# Altium PCB PCB1.PcbDoc
Units mil, origin at the board's own origin, x right, y up, seen from the top; angles counter-clockwise.
Board outline 3900 x 3900 mil, 2 copper layers (Top Layer, Bottom Layer), stack 61.756 mil thick; 48 components, 31 nets, 155 pads, 18 vias.
Unrouted connection lines stored in the file: 4.
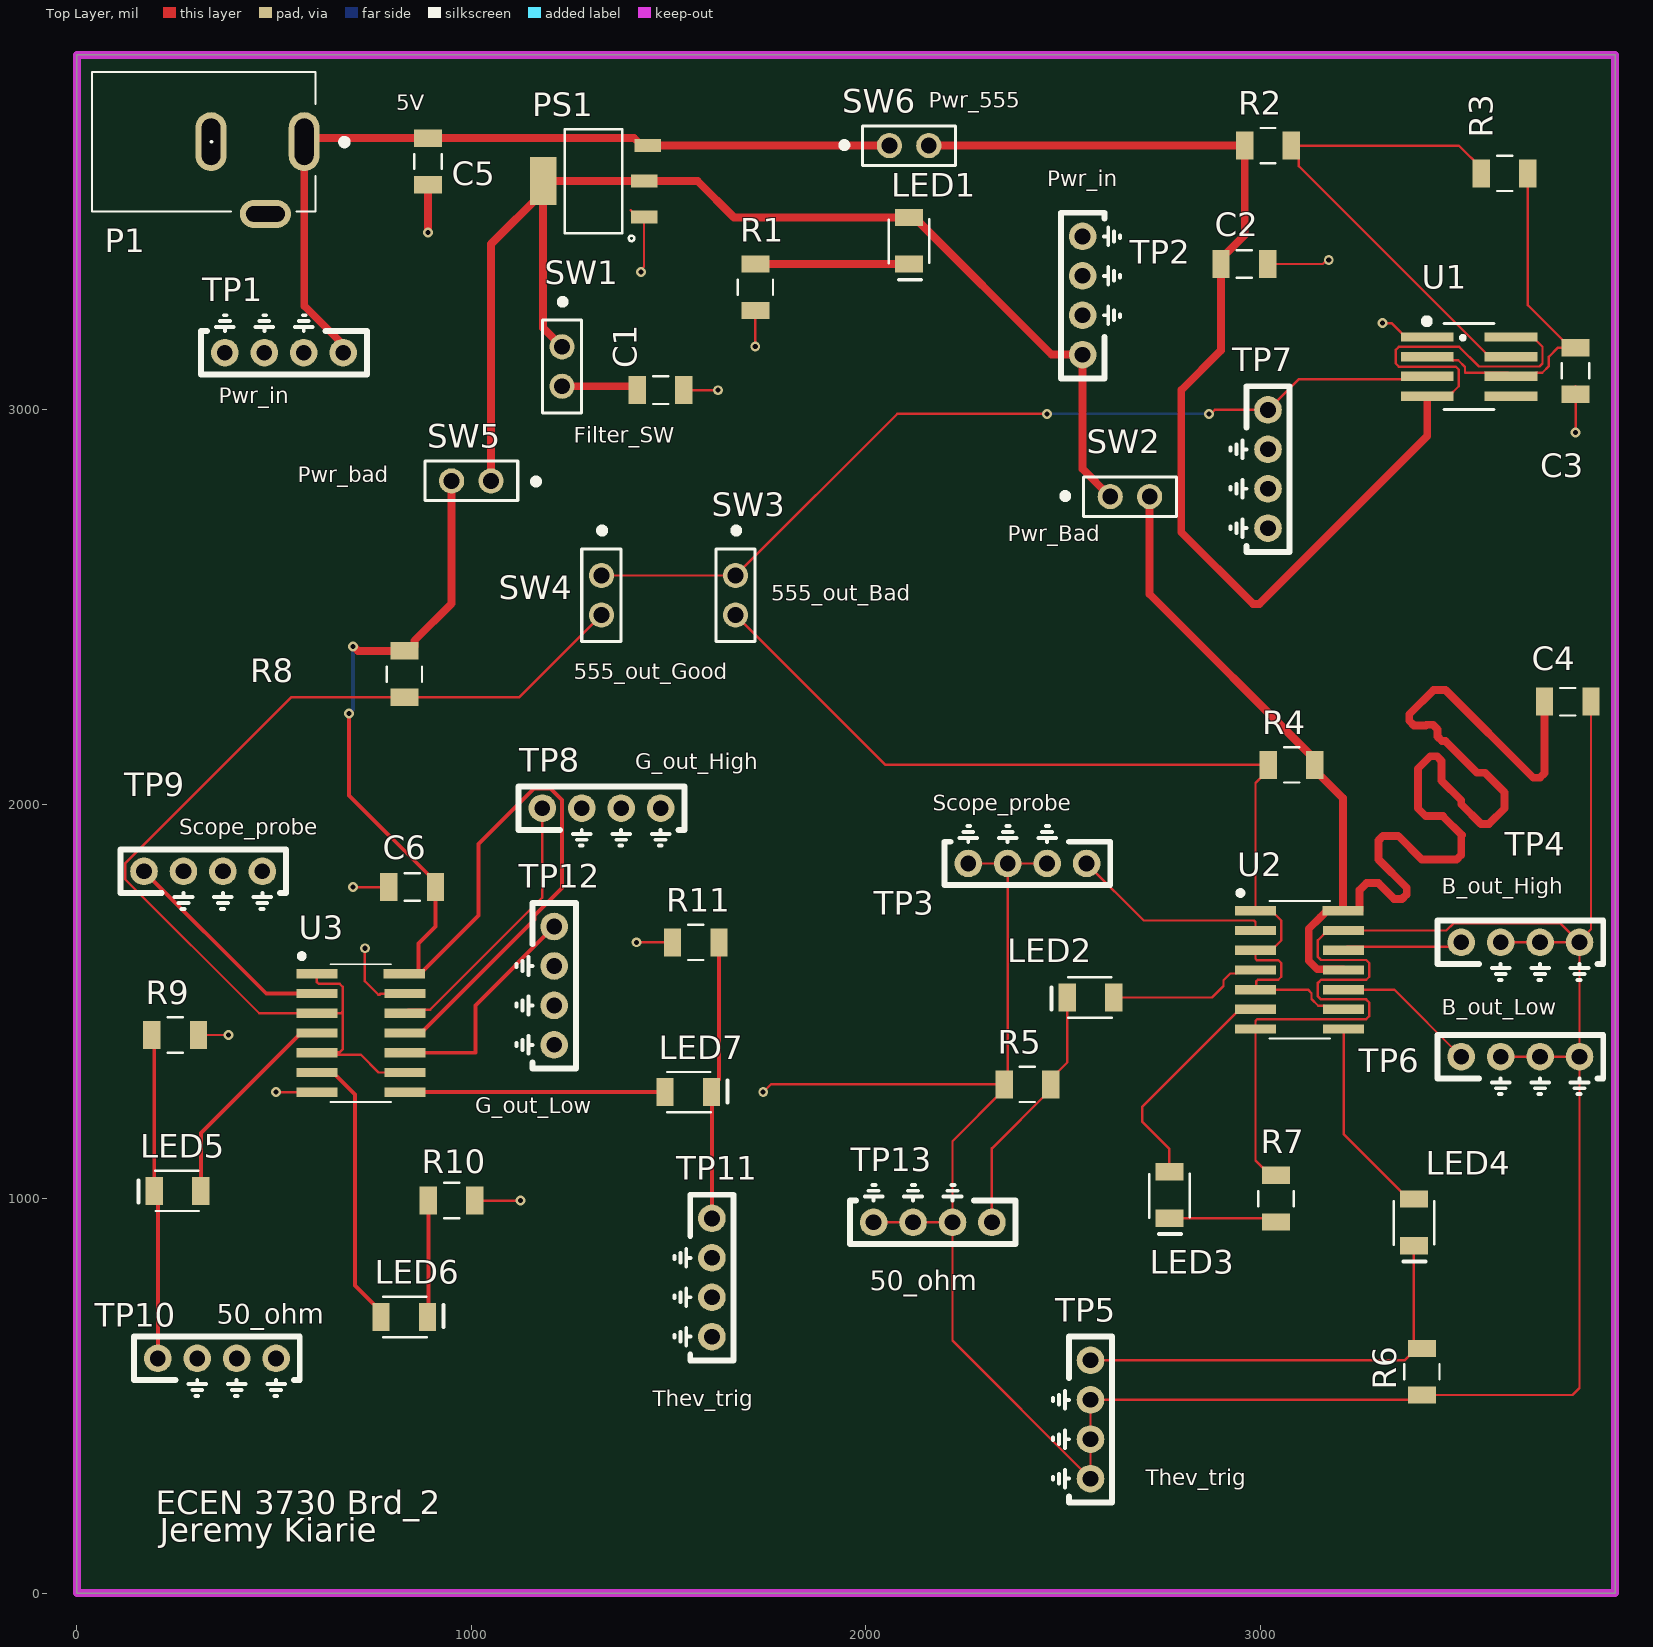
[diagram p0: Top Layer view]
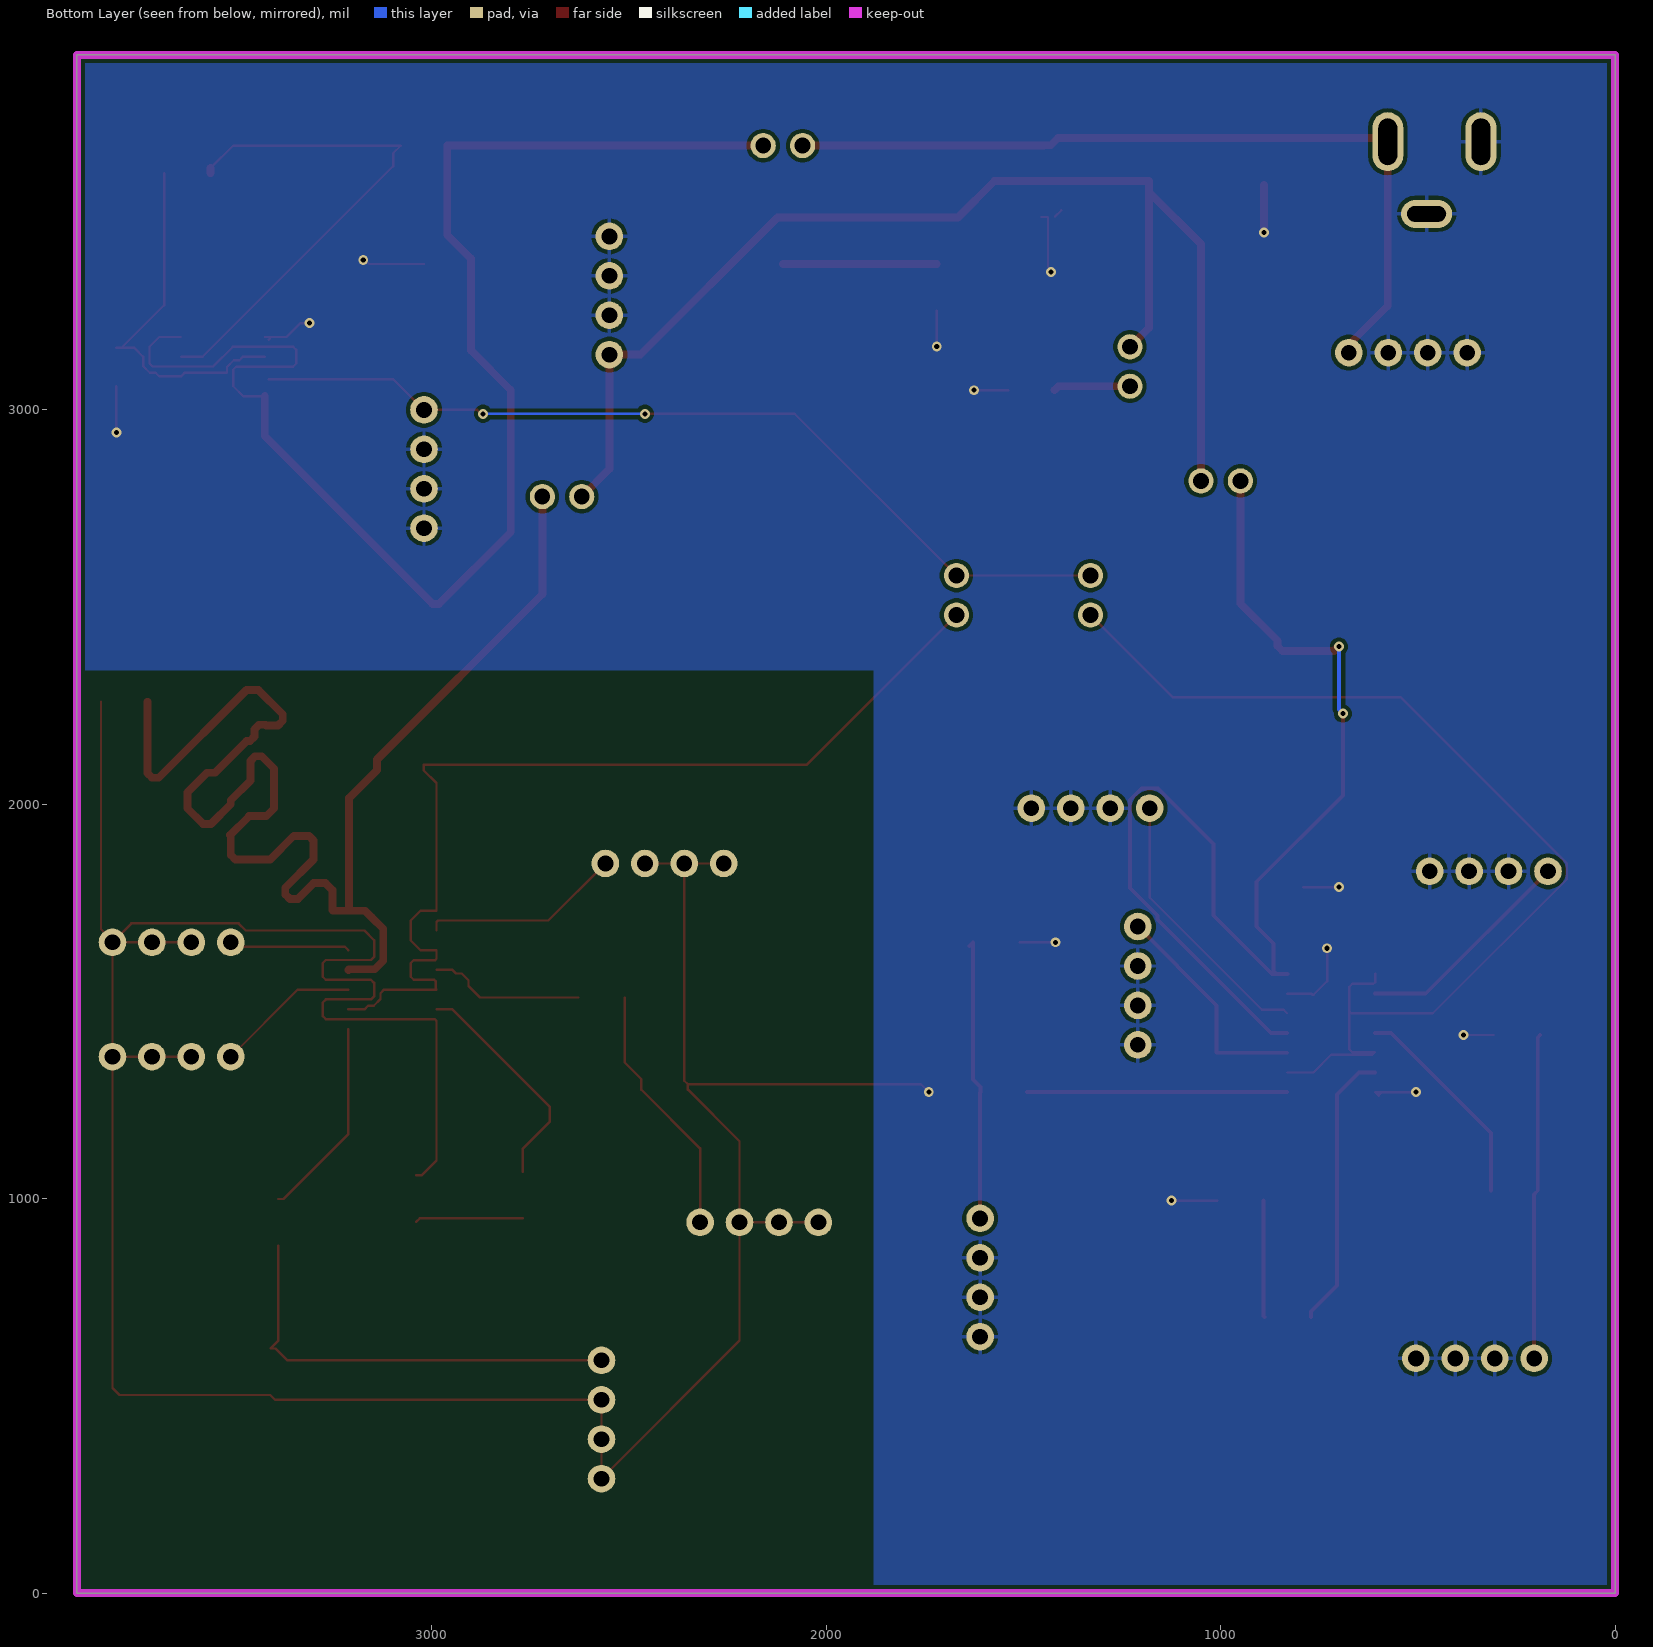
[diagram p1: Bottom Layer view, seen from below]
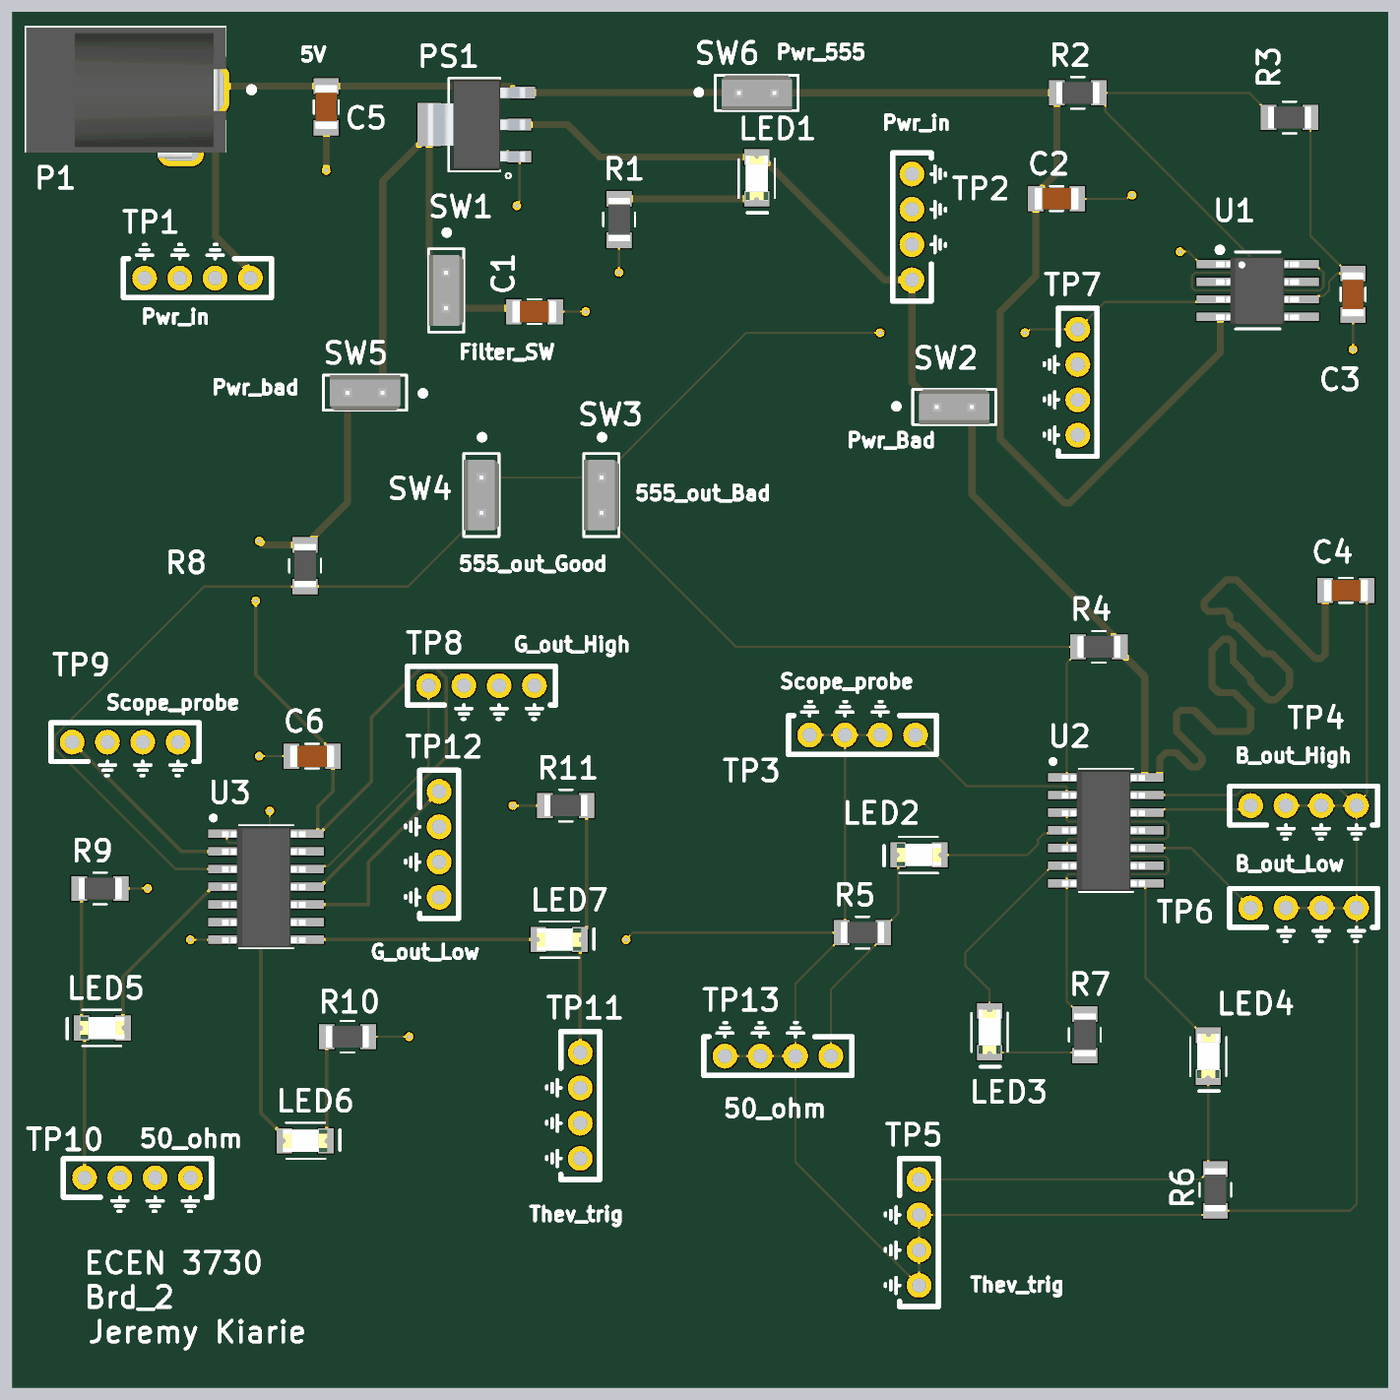
[diagram p2: 3D render of the assembled board from above, using the file's embedded part models]

## Layer stack, top to bottom
Top Solder: solder mask 1, SM-001, Dk 4
Top Layer: signal copper 1.378
Dielectric 1: core 59, Core-043, Dk 4.3
Bottom Layer: signal copper 1.378
Bottom Solder: solder mask 1, SM-001, Dk 4

## Board outline
0,0 3900,0 3900,3900 0,3900

## Design rules (kind name [scope] priority, off if disabled: settings)
BoardOutlineClearance [All] p1: gap=10 ignorepadtopadclearanceinfootprint=FALSE except(0: Arc-SplitContinuation Track-SplitContinuation SMDPad-SplitContinuation THPad-SplitContinuation Via-SplitContinuation Fill-SplitContinuation Poly-SplitContinuation Region-SplitContinuation Text-SplitContinuation)
Clearance [All] p1: gap=10 ignorepadtopadclearanceinfootprint=FALSE
PlaneClearance [All] p1: clearance=10
PlaneConnect [All] p1: planeconnectstyle=Direct reliefexpansion=20 reliefentries=4 reliefconductorwidth=10 reliefairgap=10
PolygonConnect [All] p1: thpad.connectstyle=Relief thpad.reliefconductorwidth=10 thpad.reliefentries=4 thpad.polygonreliefangle="90 Angle" thpad.airgapwidth=10 smdpad.connectstyle=Direct smdpad.reliefconductorwidth=10 smdpad.reliefentries=4 smdpad.polygonreliefangle="90 Angle" smdpad.airgapwidth=10 via.connectstyle=Direct via.reliefconductorwidth=10 via.reliefentries=4 via.polygonreliefangle="90 Angle" via.airgapwidth=10
RoutingVias [All] p1: holewidth=13 width=25 viastyle="Through Hole" minholewidth=13 minwidth=25 maxholewidth=60 maxwidth=80
SolderMaskExpansion [All] p1: expansion=4 istentingtop=FALSE
SupplyNets "Schematic Supply Nets_3" [InNet('+3.3')] p1: voltage=0.000
SupplyNets "Schematic Supply Nets_2" [InNet('GND')] p2: voltage=0.000
SupplyNets "Schematic Supply Nets_1" [InNet('+5')] p3: voltage=0.000
UnRoutedNet [All] p1: checkbadconnections=TRUE
Width "Schematic Width Constraint_4" [InNet('NetC4_2')] p1: maxlimit=100 minlimit=10 preferedwidth=20 minimp=50.000000 maximp=50.000000 favimp=50.000000
Width "Schematic Width Constraint_2" [InNet('+3.3')] p2: maxlimit=100 minlimit=10 preferedwidth=20 minimp=50.000000 maximp=50.000000 favimp=50.000000
Width "Schematic Width Constraint" [InNet('NetC6_2')] p3: maxlimit=100 minlimit=10 preferedwidth=20 minimp=50.000000 maximp=50.000000 favimp=50.000000
Width "Schematic Width Constraint_1" [InNet('+5')] p4: maxlimit=100 minlimit=10 preferedwidth=20 minimp=50.000000 maximp=50.000000 favimp=50.000000
Width [All] p5: maxlimit=100 minlimit=6 preferedwidth=6 minimp=50.000000 maximp=50.000000 favimp=50.000000
27 further rules are at their usual default settings.

## Components (designator, comment, footprint, x,y, rotation, side; value= is the part's Value field where it differs from the comment)
C1 "22uF" 1206_Passive_Capacitor 1480,3050 r180 top
C2 "22uF" 1206_Passive_Capacitor 2960,3370 r180 top
C3 "1uF" 1206_Passive_Capacitor 3800,3099 r270 top
C4 "22uF" 1206_Passive_Capacitor 3780,2260 r180 top
C5 "22uF" 1206_Passive_Capacitor 890,3630 r90 top
C6 "22uF" 1206_Passive_Capacitor 850,1790 r0 top
LED1 "Green" LED_1206 2110,3429 r270 top
LED2 "Red" LED_1206 2570,1510 r180 top
LED3 "Red" LED_1206 2770,1009 r270 top
LED4 "Red" LED_1206 3390,940 r270 top
LED5 "Red" LED_1206 255,1020 r180 top
LED6 "Red" LED_1206 830,700 r0 top
LED7 "Red" LED_1206 1550,1270 r0 top
P1 "Power Jack" Power_Jack 576.22,3680 r180 top value="CONN PWR JACK 2X5.5MM SOLDER"
PS1 "AMS1117-3.3" LDO 1310,3580 r90 top value="IC REG LINEAR 3.3V 800MA SOT223"
R1 "1k" 1206_Passive_Resitor 1720,3311 r90 top value="1K Ohm"
R2 "1k" 1206_Passive_Resitor 3020,3670 r0 top value="1K Ohm"
R3 "1k" 1206_Passive_Resitor 3620,3600 r0 top value="1K Ohm"
R4 "10k" 1206_Passive_Resitor 3080,2100 r0 top value=10KOhm
R5 "47 Ohms" 1206_Passive_Resitor 2410,1290 r0 top value=47Ohm
R6 "47 Ohms" 1206_Passive_Resitor 3410,561 r90 top value=47Ohm
R7 "47 Ohms" 1206_Passive_Resitor 3040,1000 r270 top value=47Ohm
R8 "10k" 1206_Passive_Resitor 830,2330 r90 top value=10KOhm
R9 "47 Ohms" 1206_Passive_Resitor 249,1415 r180 top value=47Ohm
R10 "47 Ohms" 1206_Passive_Resitor 950,995 r180 top value=47Ohm
R11 "47 Ohms" 1206_Passive_Resitor 1569,1650 r0 top value=47Ohm
SW1 "SW_2Pin_100mil_Switch" 2Pin-Header-Conn 1230,3160 r270 top
SW2 "pwr_bad" 2Pin-Header-Conn 2620,2780 r0 top
SW3 "555_out_Bad" 2Pin-Header-Conn 1670,2580 r270 top
SW4 "555_out_Good" 2Pin-Header-Conn 1330,2580 r270 top
SW5 "pwr_good" 2Pin-Header-Conn 1050,2820 r180 top
SW6 "Pwr_555_SW" 2Pin-Header-Conn 2060,3670 r0 top
TP1 "Power_in_TP" TP10x_Probe 525,3145 r180 top
TP2 "Power_in_TP" TP10x_Probe 2550,3290 r90 top
TP3 "Scope_TP" TP10x_Probe 2410,1850 r180 top
TP4 "B_out_High" TP10x_Probe 3660,1650 r0 top
TP5 "trig_thev" TP10x_Probe 2570,440 r270 top
TP6 "B_out_Low" TP10x_Probe 3660,1360 r0 top
TP7 "555_out_TP" TP10x_Probe 3020,2850 r270 top
TP8 "G_out_High" TP10x_Probe 1330,1990 r0 top
TP9 "Scope_TP" TP10x_Probe 320,1830 r0 top
TP10 "B_50_TP" TP10x_Probe 355,595 r0 top
TP11 "trig_thev" TP10x_Probe 1610,800 r270 top
TP12 "G_out_Low" TP10x_Probe 1210,1540 r270 top
TP13 "G_50_TP" TP10x_Probe 2170,940 r180 top
U1 "555_Slow" TS555IDTTR 3530,3110 r0 top
U2 "SN74AHC14DR" HEX_74AC14 3100,1580 r0 top
U3 "SN74AHC14DR" HEX_74AC14 720,1420 r0 top

## Footprints (in the part's own frame and the unit in brackets; to place one, negate y for a bottom-side part, rotate by r counter-clockwise, add the part's x,y. Pads: shape width x height; smd on the part's side, far side on the other; paste and mask are expansions set on the pad)
2Pin-Header-Conn [mm]
  round 1.62 hole 1.02: 1(0,0) 2(2.54,0)
  silkscreen extent -3.03,-1.27 4.26,1.26, body extent -1.27,-1.27 3.81,1.27, height 8.13
1206_Passive_Capacitor [mil]
  rect 44x71 smd: 1(-59,0) 2(59,0)
  silkscreen extent -19,-35 19,35, body extent -63,-31 63,32, height 50
1206_Passive_Resitor [mil]
  rect 44x71 smd: 1(-59,0) 2(59,0)
  silkscreen extent -19,-45 19,45, body extent -61,-31 61,31, height 26
HEX_74AC14 [mm]
  rect 2.65x0.6 smd: 1(-2.836,3.81) 2(-2.836,2.54) 3(-2.836,1.27) 4(-2.836,0) 5(-2.836,-1.27) 6(-2.836,-2.54) 7(-2.836,-3.81) 8(2.836,-3.81) 9(2.836,-2.54) 10(2.836,-1.27) 11(2.836,0) 12(2.836,1.27) 13(2.836,2.54) 14(2.794,3.81)
  silkscreen extent -3.94,-4.43 1.95,5.08, body extent -3.18,-4.35 2.82,4.3, height 1.75
LDO [mm]
  rect 0.838x1.7 smd: 1(-2.311,-3.25) 2(0,-3.25) 3(2.311,-3.5)
  rect 3.099x1.7 smd: 4(0,3.25)
  silkscreen extent -3.86,-2.62 3.35,1.85, body extent -3.25,-3.65 3.25,3.35, height 1.85
LED_1206 [mil]
  rect 44x71 smd: 1(-59,0) 2(59,0)
  silkscreen extent -54,-51 99,51, body extent -63,-31 63,31, height 28
Power_Jack [mm]
  oval 2x3.8 hole 1.2 slot 3 at 90 deg: 1(0,0) 2(6,0)
  oval 3.3x1.8 hole 1 slot 2.5 at 0 deg: 3(2.5,4.65)
  silkscreen extent -2.79,-4.5 13.68,4.5, body extent -0.76,-4.45 13.64,4.95, height 11.49
TP10x_Probe [mil] "Small Probs footprint"
  round 70 hole 40: 1(-150,0) 2(-50,0) 2(50,0) 2(150,0)
  silkscreen extent -210,-95 210,55
TS555IDTTR [mm] "IC OSC Single Timer 2.7MHz 8SOIC"
  rect 3.4x0.6 smd: 1(-2.7,1.905) 2(-2.7,0.635) 3(-2.7,-0.635) 4(-2.7,-1.905) 5(2.7,-1.905) 6(2.7,-0.635) 7(2.7,0.635) 8(2.7,1.905)
  silkscreen extent -2.85,-2.77 1.6,3.05, body extent -3.03,-2.48 2.96,2.43, height 1.75

## Part data
C1 C2 C4 C5 C6: library part C_22uF_1206, "22uF ±10% 25V X5R 1206 Multilayer Ceramic Capacitors MLCC - SMD/SMT RoHS", LCSC Part#=C12891, MFR Part #=CL31A226KAHNNNE, Datasheet=https://datasheet.lcsc.com/lcsc/1811031514_Samsung-Electro-Mechanics-CL31A226KAHNNNE_C12891.pdf, Type=basic
C3: library part C_1uF_1206, "MULTILAYER CERAMIC CAPACITORS MLCC - SMD/SMT 1UF 50V 1206 ROHS", LCSC Part#=C1848, MFR Part #=CL31B105KBHNNNE, Digikey Link=https://www.digikey.com/product-detail/en/C1206C105M4RACTU/399-8150-1-ND/3471873/?itemSeq=304982366, Type=Basic
LED1: library part LED_GREEN_1206, "Green 513~528nm 1206 Light Emitting Diodes (LED) RoHS", LCSC Part#=C434439, MFR Part #=SZYY1206G, Datasheet=https://datasheet.lcsc.com/lcsc/2006301532_Yongyu-Photoelectric-SZYY1206G_C434439.pdf, Type=Extended
LED2 LED3 LED4 LED5 LED6 LED7: library part LED_RED_1206, "Red 621~631nm 1206 Light Emitting Diodes (LED) RoHS", LCSC Part#=C93133, MFR Part #=15-21/R6C-FQ1R1B/2T, Datasheet=https://datasheet.lcsc.com/szlcsc/1811151241_Everlight-Elec-15-21-R6C-FQ1R1B-2T_C93133.pdf, Type=Extended
P1: library part "P_Power Jack", "Power Barrel Connector Jack 2.10mm ID (0.083\"), 5.50mm OD (0.217\") Through Hole, Right Angle", LCSC Part#=C136744, MFR Part #=PJ-102A, Digikey Link=https://www.digikey.com/product-detail/en/PJ-102A/CP-102A-ND/275425/?itemSeq=304982367, Type=Extended
PS1: library part PS_AMS_LDO_3v3, "LOW DROPOUT REGULATORS(LDO) POSITIVE FIXED 1.3V @ 800MA 15V 3.3V 1A SOT-223 ROHS", LCSC Part#=C6186, MFR Part #=AMS1117-3.3, Type=Basic
R1 R2 R3: library part R_1K_1206, "CHIP RESISTOR - SURFACE MOUNT 1KOHMS ±1% 1/4W 1206 ROHS", LCSC Part#=C4410, MFR Part #=RNCP1206FTD1K00CT, Digikey Link=https://www.digikey.com/product-detail/en/RNCP1206FTD1K00/RNCP1206FTD1K00CT-ND/2240675/?itemSeq=304982373, Type=Basic
R4 R8: library part R_10KOhm_1206, "10 kOhms ±5% 0.25W, 1/4W Chip Resistor 1206 (3216 Metric) Automotive AEC-Q200 Thick Film", LCSC Part#=C17902, MFR Part #=RMCF1206FT10K0, Digikey Link=https://www.digikey.com/en/products/detail/stackpole-electronics-inc/RMCF1206FT10K0/1759669, Type=Basic
R5 R6 R7 R9 R10 R11: library part R_47Ohm_1206, "47Ω ±5% 0.25W ±200ppm/℃ 1206 Chip Resistor - Surface Mount RoHS", LCSC Part#=C25384, MFR Part #=1206W4J0470T5E, Datasheet=https://datasheet.lcsc.com/lcsc/1811101020_UNI-ROYAL-Uniroyal-Elec-1206W4J0470T5E_C25384.pdf, Type=Extended
SW1: "2Pin Header", LCSC Part#=C124375, Type=Extended
SW2 SW3 SW4 SW5 SW6: library part SW_2Pin_100mil_Switch, "2Pin Header", LCSC Part#=C124375, Type=Extended
TP1 TP2 TP3 TP4 TP5 TP6 TP7 TP8 TP9 TP10 TP11 TP12 TP13: library part TP_10x_Probe, "Test Point 300 mil centers"
U1: library part U_555_Slow, "555 Timer SOIC-8_150MIL ROHS 150ns Rise Time", LCSC Part#=C7593, MFR Part #=NE555DR, Digikey Link=https://www.digikey.com/product-detail/en/texas-instruments/NE555DR/296-6501-1-ND/372490, Type=Basic
U2 U3: library part U_74AHC14, "Inverter IC 6 Channel Schmitt Trigger 14-SOIC", LCSC Part#=C6942, Datasheet=https://datasheet.lcsc.com/szlcsc/ON-Semicon-ON-74AC14SCX_C5482.pdf, MFR Part #=SN74AHC14DR, Type=Extended

## Via types
v1: diameter 25, hole 13, Top Layer to Bottom Layer, 18 vias

## Nets (pads, with @x,y where several pads share a name; then routed paths per layer and width w, separated by ;. In a path a pad name is that pad's centre, name@x,y a point inside that pad or via, vN(x,y) a via of type N, cw(c..) or ccw(c..) an arc to the next point about the centre after c; other vN are vias at no path point)
555_Output: SW3.1 SW4.1 TP7.1 U1.3 | length 2290.1
  Top Layer w6: SW4.1 SW3.1 2080,2990 v1(2460,2990) ; v1(2870,2990) 2875.14,2990 2885.14,3000 TP7.1 3097.29,3077.29 U1.3@3414.14,3077.29
  Bottom Layer w6: v1(2460,2990) v1(2870,2990)
+3.3: LED1.1 PS1.2 PS1.4 SW1.1 SW2.1 SW5.1 TP2.1 | length 3180.4
  Top Layer w10: SW5.1 SW5.1@1060,2830
  Top Layer w20: SW5.1 1050,3420.42 PS1.4@1182.05,3552.46 ; SW1.1 1182.05,3207.95 PS1.4@1182.05,3552.46 ; SW2.1 2550,2850 TP2.1 2471.5,3140 2123.5,3488 LED1.1 1666.22,3488 1574.22,3580 PS1.2 PS1.4 PS1.4@1182.05,3552.46
+5: C5.2 P1.1 PS1.3 SW6.1 TP1.1 | length 2058.4
  Top Layer w20: TP1.1@680,3160 576.22,3263.78 P1.1 585.22,3689 C5.2 1412.83,3689 1430.83,3671 PS1.3 1448.3,3670.5 2059.5,3670.5 SW6.1
GND: C1.1 C2.1 C3.2 C4.1 C5.1 C6.1 P1.2 P1.3 PS1.1 R1.1 R5.1 R6.1 R7.1 R9.1 R10.1 R11.1 TP1.2 TP2.2 TP3.2 TP4.2 TP5.2 TP6.2 TP7.2 TP8.2 TP9.2 TP10.2 TP11.2 TP12.2 TP13.2 U1.1 U2.7 U2.13 U3.7 U3.13 | length 9971.6
  Top Layer w6: R9.1 v1(384,1415) ; v1(505,1270) 590.72,1270 599.54,1261.19 U3.7 U3.7@567.99,1270 ; v1(700,1790) C6.1 ; v1(730,1635) 730,1551.41 763.93,1517.49 767.49,1517.49 770,1520 U3.13 ; R10.1 v1(1125,995) ; 1404.04,3505.95 PS1.1@1419.99,3490 ; v1(1419,1650) R11.1 ; v1(1430,3350) 1430,3355.14 1437.95,3363.09 PS1.1 PS1.1@1454.92,3489 ; C1.1 v1(1625,3050) ; v1(1720,3161) R1.1 ; v1(1740,1270) 1760,1290 R5.1 ; TP13.2@2020,940 2120,940 TP13.2@2220,940 ; TP3.2@2260,1850 TP3.2@2360,1850 ; TP3.2@2460,1850 TP3.2@2360,1850 ; C2.1 3158.86,3370 3168.86,3380 v1(3174,3380) ; R7.1 3026.5,1059 2988.35,1097.15 U2.7 2988.35,1450.81 2992.72,1455.19 3269.2,1455.19 3276.82,1462.8 3276.82,1497.2 3268.83,1505.19 3154.1,1505.19 3146.49,1512.8 3146.49,1547.2 3154.29,1555 3269.01,1555 3276.82,1562.8 3276.82,1597.2 3269.01,1605 3154.29,1605 3146.49,1612.8 3146.49,1655.19 3171.3,1680 3472.12,1680 3490.12,1698 3762,1698 TP4.2@3810,1650 ; v1(3310,3220) 3333.58,3220 3368.58,3185 U1.1 ; U1.1@3411.43,3180 U1.1@3414.14,3177.29 ; TP6.2@3610,1360 3710,1360 TP6.2@3810,1360 ; TP4.2@3610,1650 3710,1650 TP4.2@3810,1650 ; v1(3800,2943) C3.2 C3.2@3800,3060 ; C4.1 3839,1683.23 3810,1654.23 TP4.2@3810,1650 ; TP13.2@2220,940 2220,640 2570,290 2570,390 2570,490 3398,490 R6.1 3792,502 3810,520 TP6.2@3810,1360 ; TP13.2@2220,940 2220,1145.5 2351,1276.5 R5.1 ; R5.1 2360,1299 TP3.2@2360,1850 ; TP6.2@3810,1360 TP4.2@3810,1650
  Top Layer w20: v1(890,3450) C5.1
NetC1_2: C1.2 SW1.2 | length 195.1
  Top Layer w20: SW1.2 1411,3060 C1.2
NetC2_2: C2.2 R2.1 SW6.2 U1.4 U1.8 | length 3689.4
  Top Layer w6: U1.4 3478.82,3035 3503.63,3059.81 3503.63,3102.2 3496.01,3109.81 3351.77,3109.81 3343.77,3117.8 3343.77,3152.2 3351.39,3159.81 3505.19,3159.81 3554.81,3110.19 3708.61,3110.19 3716.23,3117.8 3716.23,3160.19 3691.42,3185 U1.8
  Top Layer w20: SW6.2 R2.1 2961,3443.5 2901,3383.5 C2.2 2901,3151 2800,3050 2800,2690 2981.72,2508.28 2998.28,2508.28 3423.7,2933.7 U1.4
NetC3_1: C3.1 R3.2 U1.2 U1.6 | length 936.1
  Top Layer w6: U1.2 3478.82,3135 3488.01,3125.81 3502.64,3125.81 3519.63,3108.82 3519.63,3094.19 3520.01,3093.81 3627.49,3093.81 U1.6 3691.42,3085 3700.61,3094.19 3715.24,3094.19 3732.23,3111.18 3732.23,3134.73 3755.5,3158 C3.1@3786.5,3158 ; R3.2 3679,3265.5 C3.1@3786.5,3158 ; C3.1 C3.1@3786.5,3158
NetC4_2: C4.2 R4.2 SW2.2 U2.11 U2.14 | length 3868.3
  Top Layer w20: SW2.2 2720,2532.5 3139,2113.5 R4.2 3139,2086.5 3210,2015.5 U2.14 ; U2.11 3209.84,1581.81 3144.95,1581.81 3123.49,1603.28 3123.49,1684.1 3153.44,1714.05 3153.69,1714.05 3169.65,1730 U2.14 ; C4.2 3721,2079 3709.28,2067.28 3692.72,2067.28 3470,2290 3440,2290 3378.28,2228.28 3378.28,2211.72 3390,2200 3420,2200 3421.72,2201.72 3438.28,2201.72 3450,2190 3450,2171.72 3461.72,2160 3470,2160 3550,2080 3570,2080 3620,2030 3620,1990 3580,1950 3560,1950 3510,2000 3510,2010 3460,2060 3460,2110 3448.28,2121.72 3431.72,2121.72 3400,2090 3400,1990 3420,1970 3463.43,1970 3511.72,1921.72 3510,1920 3510,1871.72 3498.28,1860 3410,1860 3350,1920 3311.72,1920 3300,1908.28 3300,1860 3371.72,1788.28 3371.72,1771.72 3360,1760 3340,1760 3300,1800 3270,1800 3252.17,1782.17 3252.17,1731.81 3250.35,1730 U2.14
NetC6_2: C6.2 R8.2 SW5.2 U3.11 U3.14 | length 3061
  Top Layer w10: v1(690,2230) 690,2022.5 909,1803.5 C6.2 909,1689.8 865.7,1646.51 865.7,1576.81 U3.14@858.89,1570 ; U3.14 U3.14@858.89,1570 ; U3.11 872.01,1420 1160,1707.99 1160,1717.9 1230,1787.9 1230,2010.71 1200.71,2040 1159.29,2040 1018.23,1898.94 1018.23,1717.87 870.35,1570 U3.14@858.89,1570
  Top Layer w20: v1(700,2400) 701.35,2400 712.35,2389 R8.2 843.5,2389 855.5,2401 855.5,2414.5 950,2509 SW5.2
  Bottom Layer w10: v1(690,2230) 700,2240 v1(700,2400)
NetLED1_2: LED1.2 R1.2 | length 390
  Top Layer w20: R1.2 LED1.2
NetLED2_1: LED2.1 U2.4 | length 396.9
  Top Layer w6: LED2.1 2877.99,1510 2907.18,1539.19 2907.18,1553.82 2924.17,1570.81 2938.8,1570.81 2947.99,1580 U2.4
NetLED2_2: LED2.2 R5.2 TP13.1 | length 649.1
  Top Layer w6: TP13.1 2320,1127.5 2469,1276.5 R5.2 2469,1303.5 2511,1345.5 LED2.2
NetLED3_1: LED3.1 U2.6 | length 582.8
  Top Layer w6: LED3.1 2770,1125.99 2701.48,1194.5 2701.48,1233.49 2947.99,1480 U2.6
NetLED3_2: LED3.2 R7.2 | length 273.7
  Top Layer w6: LED3.2 3031,950 R7.2
NetLED4_1: LED4.1 U2.8 | length 512.8
  Top Layer w6: U2.8 3211.65,1163.85 3376.5,999 LED4.1
NetLED4_2: LED4.2 R6.2 TP5.1 | length 1120.3
  Top Layer w6: TP5.1 3366.5,590 3396.5,620 3409,620 3390,639 LED4.2
NetLED5_1: LED5.1 U3.4 | length 545.6
  Top Layer w10: LED5.1 314,1166.01 567.99,1420 U3.4
NetLED5_2: LED5.2 R9.2 TP10.1 | length 826.2
  Top Layer w10: R9.2 196,1409 LED5.2 205,1011 TP10.1
NetLED6_1: LED6.1 U3.6 | length 711
  Top Layer w10: U3.6 648.7,1320 704.76,1263.95 704.76,779.74 771,713.5 LED6.1
NetLED6_2: LED6.2 R10.2 | length 295.8
  Top Layer w10: LED6.2 891,702 R10.2
NetLED7_1: LED7.1 U3.8 | length 659.3
  Top Layer w10: U3.8 LED7.1
NetLED7_2: LED7.2 R11.2 TP11.1 | length 721
  Top Layer w10: TP11.1 1610,1269 LED7.2 1609,1283.5 1628,1302.5 R11.2 R11.2@1637,1641
NetR2_2: R2.2 R3.1 U1.7 | length 1317
  Top Layer w6: R3.1@3561,3613.5 3504.5,3670 R2.2 3098,3651 3098,3618.18 3581.18,3135 U1.7
  Top Layer w20: R3.1 R3.1@3561,3613.5
NetR4_1: R4.1 SW3.2 U2.1 U2.3 U2.5 U2.9 | length 2561.6
  Top Layer w6: SW3.2 2050,2100 R4.1 3021,2086.5 2988.35,2053.85 U2.1 3028.7,1730 3053.51,1705.19 3053.51,1654.81 3028.7,1630 U2.3 2988.35,1608.33 2991.86,1604.81 3045.9,1604.81 3053.51,1597.2 3053.51,1562.8 3045.9,1555.19 2994.38,1555.19 2990,1550.81 2990,1531.65 U2.5 3121.3,1530 3130.49,1520.81 3130.49,1506.18 3147.48,1489.19 3162.11,1489.19 3171.3,1480 U2.9
NetR8_1: R8.1 SW4.2 U3.1 U3.3 U3.5 U3.9 | length 2763
  Top Layer w6: U3.1 608.35,1549.19 612.72,1544.81 665.9,1544.81 673.51,1537.2 673.51,1474 673.51,1473.51 ; U3.9 765,1320 720,1365 615.34,1365 609.34,1371 666,1371 673.51,1378.51 673.51,1473.51 ; SW4.2 1121,2271 R8.1 543.12,2271 122,1849.88 122,1810.12 462.12,1470 U3.3 669.51,1470 673.02,1473.51 673.51,1473.51
NetTP3_1: TP3.1 U2.2 | length 511.5
  Top Layer w6: TP3.1 2704.81,1705.19 2984.83,1705.19 2988.35,1701.67 U2.2
NetTP4_1: TP4.1 U2.12 | length 306.6
  Top Layer w6: U2.12 3220.46,1638.81 3498.81,1638.81 TP4.1
NetTP6_1: TP6.1 U2.10 | length 368.8
  Top Layer w6: U2.10 3340,1530 TP6.1
NetTP8_1: TP8.1 U3.12 | length 696.5
  Top Layer w6: U3.12 840.46,1478.81 895.45,1478.81 1180,1763.36 TP8.1
NetTP9_1: TP9.1 U3.2 | length 566.8
  Top Layer w10: TP9.1 480,1520 U3.2
NetTP12_1: TP12.1 U3.10 | length 581.2
  Top Layer w10: U3.10 1010,1370 1010,1490 TP12.1
pads on no net: U1.5

## Polygon pours and split planes (outlines as drawn)
GND on Bottom Layer "GND_L02_P000" (solid, pour order 0): 0,3900 0,0 3900,0 3900,3900

## Keep-outs
Keep-Out Layer:
  the board outline again, w20

## Other copper
Bottom Layer:
  pour cut-out: 1880,2340 1880,20 3900,20 3900,2340

## Silkscreen, mask and mechanical layers (free items; w line width, h text height)
Top Overlay:
  text "Pwr_555" at 2160,3766.66 h40
  text "5V" at 810,3760 h40
  text "Pwr_in" at 2460,3566.66 h40
  text "Pwr_in" at 360,3016.66 h40
  text "Filter_SW" at 1260,2916.66 h40
  text "Pwr_bad" at 560,2816.66 h40
  text "Pwr_Bad" at 2360,2666.66 h40
  text "555_out_Bad" at 1760,2516.66 h40
  text "555_out_Good" at 1260,2316.66 h40
  text "G_out_High" at 1415,2088.33 h40
  text "Scope_probe" at 2170,1983.33 h40
  text "Scope_probe" at 260,1923.33 h40
  text "B_out_High" at 3460,1773.33 h40
  text "B_out_Low" at 3460,1466.66 h40
  text "G_out_Low" at 1010,1216.66 h40
  text "50_ohm" at 2010,768.33 h50
  text "50_ohm" at 355,683.33 h50
  text "Thev_trig" at 1460,473.33 h40
  text "Thev_trig" at 2710,273.33 h40
  text "ECEN 3730 Brd_2" at 200,200 h60
  text "Jeremy Kiarie" at 210,129.99 h60